# Altium PCB pcb.PcbDoc
Units mm, origin at the board's own origin, x right, y up, seen from the top; angles counter-clockwise.
Board outline 77.5 x 20 mm, 2 copper layers (Top Layer, Bottom Layer); 41 components, 45 nets, 171 pads, 16 vias.
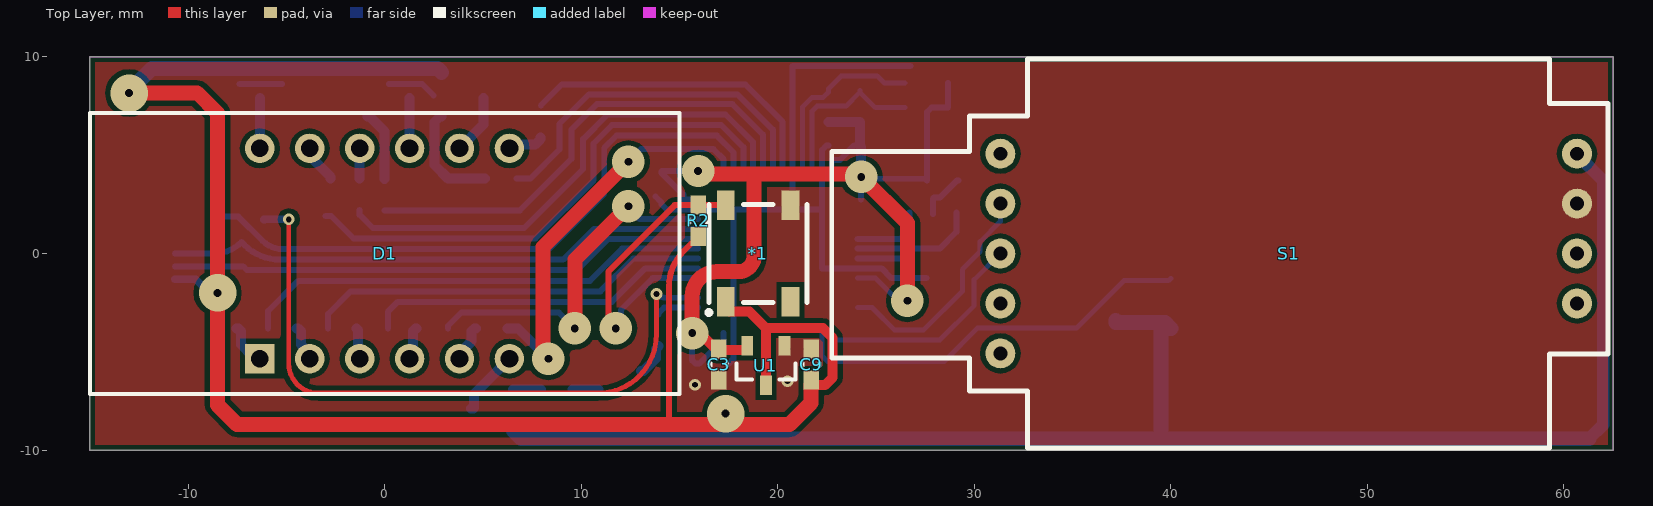
[diagram p0: Top Layer view]
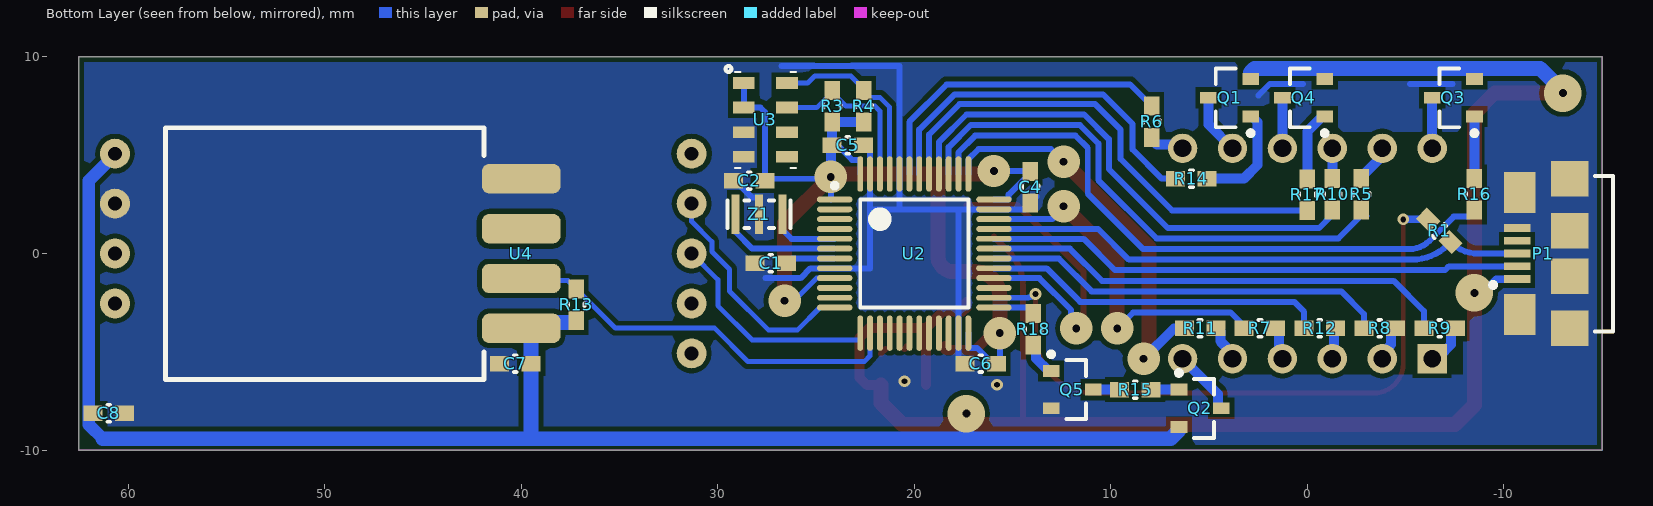
[diagram p1: Bottom Layer view, seen from below]
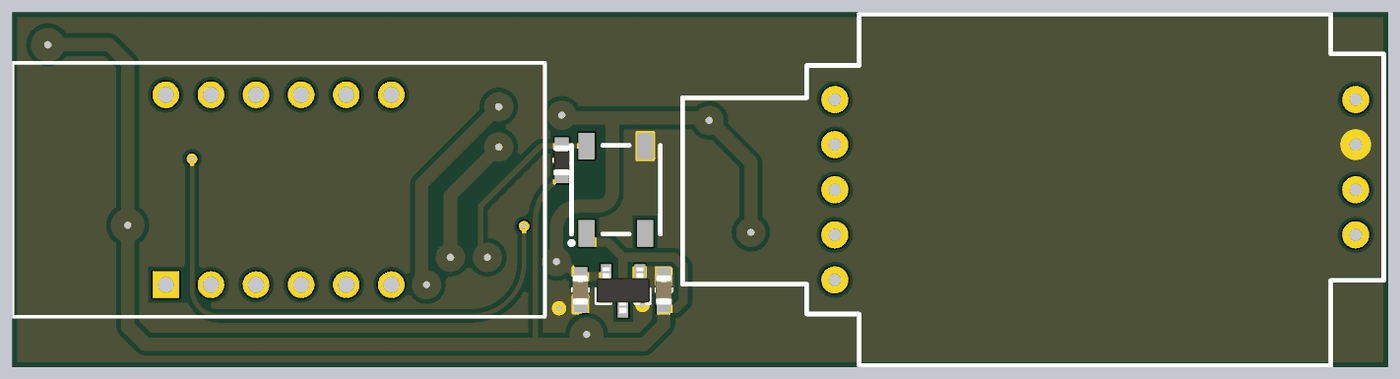
[diagram p2: 3D render of the assembled board from above, using the file's embedded part models]
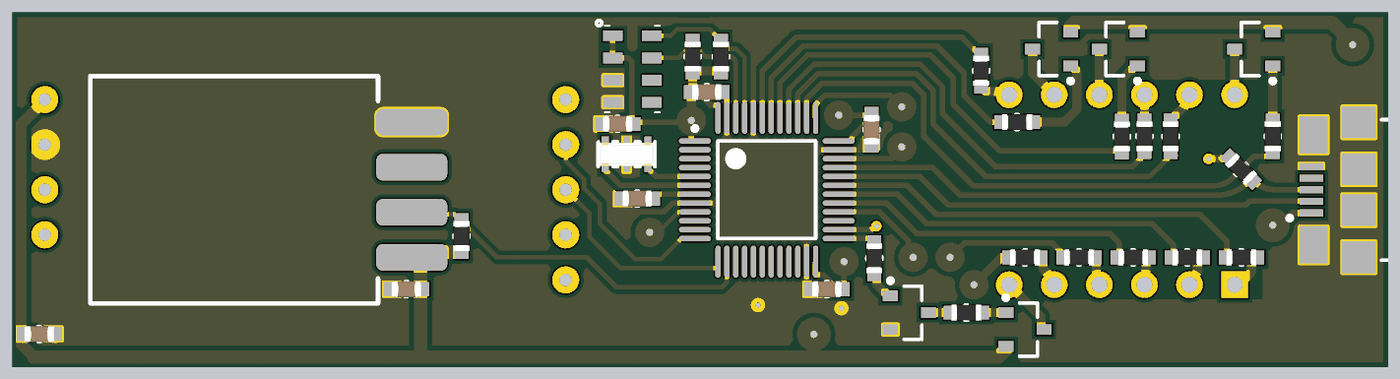
[diagram p3: 3D render of the assembled board from below, using the file's embedded part models]

## Layer stack, top to bottom
Top Solder: solder mask 0.0102, Solder Resist, Dk 3.5
Top Layer: signal copper 0.0356
Dielectric 1: dielectric 0.32, FR-4, Dk 4.8
Bottom Layer: signal copper 0.0356
Bottom Solder: solder mask 0.0102, Solder Resist, Dk 3.5

## Board outline
-15,-10 -15,10 62.5,10 62.5,-10

## Design rules (kind name [scope] priority, off if disabled: settings)
Clearance [All] p1: gap=0.127 ignorepadtopadclearanceinfootprint=FALSE except(0.254: Arc-Fill Arc-Poly Arc-Region Track-Fill Track-Poly Track-Region SMDPad-Fill SMDPad-Poly SMDPad-Region THPad-Fill THPad-Poly THPad-Region Via-Fill Via-Poly Via-Region Fill-Fill Fill-Poly Fill-Region Poly-Poly Poly-Region Region-Region)
MinimumSolderMaskSliver [All] p1 off: minsoldermaskwidth=0.254
PolygonConnect [All] p1: connectstyle=Direct reliefconductorwidth=0.254 reliefentries=4 polygonreliefangle="90 Angle" airgapwidth=0.254
RoutingVias [All] p1: holewidth=0.711 width=1.27 viastyle="Through Hole" minholewidth=0.4 minwidth=1 maxholewidth=0.711 maxwidth=5
SilkToSolderMaskClearance [IsPad] p1 off: minsilkscreentomaskgap=0.254 clearancetoexposedcopper=TRUE
SolderMaskExpansion [All] p1: expansion=0.102 istentingtop=FALSE
Width [All] p1: maxlimit=12.7 minlimit=0.191 preferedwidth=0.254
28 further rules are at their usual default settings.

## Components (designator, comment, footprint, x,y, rotation, side; value= is the part's Value field where it differs from the comment)
*1 "LED_WS2812B" LED_WS2812b 19,0 r90 top
C1 "100nF" RC_0603 27.3,-0.5 r180 bottom
C2 "100nF" RC_0603 28.4,3.71 r180 bottom
C3 "100nF" RC_0603 17,-5.646 r90 top
C4 "100nF" RC_0603 14.1,3.383 r90 bottom
C5 "100nF" RC_0603 23.383,5.5 r0 bottom
C6 "100nF" RC_0603 16.617,-5.6 r180 bottom
C7 "100nF" RC_0603 40.3,-5.6 r180 bottom
C8 "100nF" RC_0603 60.985,-8.128 r0 bottom
C9 "100nF" RC_0603 21.7,-5.646 r270 top
D1 "7SEGx4" 7SEG_4X_MEDIUM 0,0 r0 top
P1 "USB" RR_USB_MICRO_#1 -10,0 r180 bottom
Q1 "PNP" SOT-23B_L 3.962,7.925 r0 bottom
Q2 "PNP" SOT-23B_L 5.461,-7.875 r180 bottom
Q3 "PNP" SOT-23B_L -7.425,7.925 r0 bottom
Q4 "PNP" SOT-23B_L 0.195,7.925 r0 bottom
Q5 "NPN_SOT23" SOT-23B_L 11.963,-6.925 r180 bottom
R1 "1k5" RR_0603 -6.713,1.15 r225 bottom
R2 "470" RR_0603 15.95,1.66 r270 top
R3 "2k2" RR_0603 24.183,7.5 r270 bottom
R4 "2k2" RR_0603 22.583,7.5 r270 bottom
R5 "220" RR_0603 -2.743,3.01 r90 bottom
R6 "220" RR_0603 7.925,6.706 r270 bottom
R7 "220" RR_0603 2.413,-3.81 r180 bottom
R8 "220" RR_0603 -3.683,-3.81 r180 bottom
R9 "220" RR_0603 -6.731,-3.81 r180 bottom
R10 "220" RR_0603 -1.27,3.01 r90 bottom
R11 "220" RR_0603 5.461,-3.81 r180 bottom
R12 "220" RR_0603 -0.635,-3.81 r180 bottom
R13 "2k2" RR_0603 37.2,-2.61 r270 bottom
R14 "1k" RR_0603 5.9,3.81 r180 bottom
R15 "1k" RR_0603 8.763,-6.925 r180 bottom
R16 "1k" RR_0603 -8.5,3.01 r90 bottom
R17 "1k" RR_0603 0,3 r90 bottom
R18 "1k" RR_0603 13.945,-3.861 r270 bottom
S1 "MH-Z19B" MH_Z19B 46,0 r180 top locked
U1 "XC6206P332MR" RR_SOT-23 19.4,-5.7 r270 top
U2 "STM32F302C8T6" LQFP48_N 20,0 r180 bottom
U3 "Pressure Sensor" MS5611-01BA03 27.575,6.8 r180 bottom
U4 "DHT11" DHT11 50,0 r0 bottom
Z1 "8MHz" RR_CRYSTAL_3.2X1.3 27.9,2 r180 bottom value="CER RES 8.0000MHZ 33PF SMD"

## Footprints (in the part's own frame and the unit in brackets; to place one, negate y for a bottom-side part, rotate by r counter-clockwise, add the part's x,y. Pads: shape width x height; smd on the part's side, far side on the other; paste and mask are expansions set on the pad)
7SEG_4X_MEDIUM [mm] "LED, 7-Segment Display, 9.2 mm, Dual Digit; 10 Leads; Row Space 10.7 mm; Pitch 2.54 mm"
  rect 1.5x1.5 hole 0.9: 1(-6.35,-5.35)
  round 1.5 hole 0.9: 2(-3.81,-5.35) 3(-1.27,-5.35) 4(1.27,-5.35) 5(3.81,-5.35) 6(6.35,-5.35) 7(6.35,5.35) 8(3.81,5.35) 9(1.27,5.35) 10(-1.27,5.35) 11(-3.81,5.35) 12(-6.35,5.35)
  silkscreen extent -15,-7.15 15,7.15, body extent -15,-7.15 15,7.15, height 7.1
DHT11 [mm]
  rrect50% 4x1.5 smd: 1(-10,3.81) 2(-10,1.27) 3(-10,-1.27) 4(-10,-3.81)
  silkscreen extent -8.1,-6.4 8.1,6.4, body extent -8.1,-6.4 8.1,6.4, height 6.1
LED_WS2812b [mm]
  rect 1.5x0.9 smd: 1(-2.46,1.65) 2(-2.46,-1.65) 3(2.46,-1.65) 4(2.46,1.65)
  silkscreen extent -3.1,-2.5 2.5,2.6, body extent -2.5,-2.5 2.5,2.5, height 1.6
LQFP48_N [mm] "Thin QFP, 48-Leads, Body 7x7mm, Pitch 0.5mm, IPC Medium Density"
  oval 1.8x0.3 smd: 1(-4.05,2.75) 2(-4.05,2.25) 3(-4.05,1.75) 4(-4.05,1.25) 5(-4.05,0.75) 6(-4.05,0.25) 7(-4.05,-0.25) 8(-4.05,-0.75) 9(-4.05,-1.25) 10(-4.05,-1.75) 11(-4.05,-2.25) 12(-4.05,-2.75) 25(4.05,-2.75) 26(4.05,-2.25) 27(4.05,-1.75) 28(4.05,-1.25) 29(4.05,-0.75) 30(4.05,-0.25) 31(4.05,0.25) 32(4.05,0.75) 33(4.05,1.25) 34(4.05,1.75) 35(4.05,2.25) 36(4.05,2.75)
  oval 0.3x1.8 smd: 13(-2.75,-4.05) 14(-2.25,-4.05) 15(-1.75,-4.05) 16(-1.25,-4.05) 17(-0.75,-4.05) 18(-0.25,-4.05) 19(0.25,-4.05) 20(0.75,-4.05) 21(1.25,-4.05) 22(1.75,-4.05) 23(2.25,-4.05) 24(2.75,-4.05) 37(2.75,4.05) 38(2.25,4.05) 39(1.75,4.05) 40(1.25,4.05) 41(0.75,4.05) 42(0.25,4.05) 43(-0.25,4.05) 44(-0.75,4.05) 45(-1.25,4.05) 46(-1.75,4.05) 47(-2.25,4.05) 48(-2.75,4.05)
  silkscreen extent -4.18,-2.75 2.75,3.57, body extent -3.5,-3.5 3.5,3.5, height 1.6
MH_Z19B [mm]
  round 1.524 hole 0.7: 1(-14.67,2.54) 2(-14.67,0) 3(-14.67,-2.54) 4(-14.67,-5.08) 5(14.67,-5.08) 6(14.67,-2.54) 7(14.67,0) 8(14.67,2.54) 9(14.67,5.08)
  silkscreen extent -16.25,-9.9 23.25,9.9, body extent -13.3,-9.9 13.3,9.9, height 9
MS5611-01BA03 [mm] "MS5611-01BA03 Pressure Sensor"
  rect 1.1x0.6 smd mask+0.1: 1(-1.1,1.875) 2(-1.1,0.625) 3(-1.1,-0.625) 4(-1.1,-1.875) 5(1.1,-1.875) 6(1.1,-0.625) 7(1.1,0.625) 8(1.1,1.875)
  silkscreen extent -2.03,-2.44 1.55,2.74, body extent -1.5,-2.36 1.5,2.36, height 1.02
RC_0603 [mil] "Chip Capacitor"
  rect 38x31 smd: 1(-31.5,0) 2(31.5,0)
  silkscreen extent -3,-17 3,17, body extent -33,-18 33,18, height 35
RR_0603 [mil] "Chip Resistor; Body 1.6 x 0.8 mm (LxW typ)"
  rect 38x31 smd: 1(-31.5,0) 2(31.5,0)
  silkscreen extent -3,-17 3,17, body extent -33,-18 33,18, height 22
RR_CRYSTAL_3.2X1.3 [mm]
  rect 0.4x2 smd: 1(1.2,0) 2(0,0) 3(-1.2,0)
  silkscreen extent -1.6,-0.7 1.6,0.7, body extent -1.6,-0.65 1.6,0.65, height 0.7
RR_SOT-23 [mm] "SOT23, 3-Leads, Body 2.9x1.3mm, Pitch 0.95mm, Lead Span 2.3mm, IPC High Density"
  rect 1x0.6 smd: 1(-1,0.95) 2(-1,-0.95) 3(1,0)
  silkscreen extent -0.1,-1.5 0.7,1.5, body extent -1.33,-1.5 1.27,1.5, height 1.1
RR_USB_MICRO_#1 [mm] "Connector; USB2.0, Type B, SM; 5 Position; Right Angle"
  rect 1.35x0.4 smd: 1(0.675,-1.3) 2(0.675,-0.65) 3(0.675,0) 4(0.675,0.65) 5(0.675,1.3)
  rect 1.6x2.1 smd: 6(0.8,-3.1) 6(0.8,3.1)
  rect 1.9x1.8 smd: 6(3.35,-3.8) 6(3.35,-1.15) 6(3.35,1.15) 6(3.35,3.8)
  silkscreen extent -0.68,-3.98 5.55,3.95, body extent 0.1,-3.95 5.55,3.95, height 3.9
SOT-23B_L [mm] "SOT23, 3-Leads, Body 2.9x1.3mm, Pitch 0.95mm, Lead Span 2.4mm, IPC High Density"
  rect 0.85x0.6 smd: 1(-1.075,0.95) 2(-1.075,-0.95) 3(1.075,0)
  silkscreen extent -1.2,-1.5 0.7,1.92, body extent -0.7,-1.5 0.7,1.5, height 1.14

## Part data
C1 C2 C3 C4 C5 C6 C7 C8 C9: library part Cap, "Capacitor"
P1: library part "Header 6", "Header, 6-Pin", LatestRevisionDate=17-Jul-2002, LatestRevisionNote="Re-released for DXP Platform.", Publisher="Altium Limited"
Q1 Q2 Q3 Q4: library part PNP_SOT23, "PNP Bipolar Transistor", LatestRevisionDate=29-May-2009, LatestRevisionNote="IPC-7351 Footprint Added.", PackageDescription="3-Pin SOT-23 Package 0.95 mm Pitch, 2.4 mm Lead Span", PackageReference=SOT-23B, PackageVersion=Aug-1999, Published=8-Jun-2000, Publisher="Altium Limited"
Q5: "NPN Bipolar Transistor", Code_JEDEC=TO-226-AA, LatestRevisionDate=17-Jul-2002, LatestRevisionNote="Re-released for DXP Platform.", PackageDescription="TO, Flat Index; 3 In-Line, Axial Leads; Body Dia. 4.8mm; Leads 0.55 x 0.51 mm (max)", PackageReference=TO-226-AA, Published=8-Jun-2000, Publisher="Altium Limited"
R1 R2 R3 R4 R5 R6 R7 R8 R9 R10 R11 R12 R13 R14 R15 R16 R17 R18: library part Res1, "Resistor"
S1: library part MH_Z19B
U1: library part Component_4_1
U3: library part MS5611-01BA03, "Pressure Sensor - MS5611-01BA03"
Z1: library part CSTCE8M00G55-R0, "XTAL 8.0000MHZ 33PF SMD", Manufacturer="Murata Electronics", Package="3-SMD 3,2mm x 1,3mm", Cost=0,48, Order Number=CSTCE8M00G55-R0
U2: ComponentLink1Description="Manufacturer Link", ComponentLink1URL=www.st.com/stm32, ComponentLink2Description=Datasheet, ComponentLink2URL=http://www.st.com/stonline/products/literature/ds/13587.pdf, DatasheetVersion="rev6, Mar-2008", PackageDescription="48-Pin Low-Profile Quad Flat Pack, 7 x 7 mm Body, 0.5 mm Pitch (LQFP48)", PackageReference=LQFP48, PackageVersion=Mar-2008, Published=30-May-2008, Publisher="Altium Limited"

## Via types
v1: diameter 1.651, hole 0.4, Top Layer to Bottom Layer, tented both sides, 9 vias
v2: diameter 0.6, hole 0.3, Top Layer to Bottom Layer, 4 vias
v3: diameter 1.905, hole 0.4, Top Layer to Bottom Layer, tented both sides, 3 vias

## Nets (pads, with @x,y where several pads share a name; then routed paths per layer and width w, separated by ;. In a path a pad name is that pad's centre, name@x,y a point inside that pad or via, vN(x,y) a via of type N, cw(c..) or ccw(c..) an arc to the next point about the centre after c; other vN are vias at no path point)
3V3: C2.2 C3.2 C4.2 C5.2 C6.2 R3.2 R4.2 U1.2 U2.1 U2.9 U2.24 U2.36 U2.48 U3.1 U3.2 | length 58.6
  Top Layer w0.508: v1(15.65,-4.05) 15.869,-4.269 16.258,-4.269 17,-5.011 C3.2@17,-5.04 ; C3.2@17,-5.1 C3.2@17,-5.04 ; U1.2 18.45,-4.854 18.404,-4.9 17.14,-4.9 C3.2@17,-5.04
  Top Layer w0.762: v1(15.65,-4.05) 15.65,-2.178 cw(c16.907,-2.178) 16.907,-0.921 18,-0.921 ccw(c18,-0.121) 18.8,-0.121 18.8,4.05 ; v1(15.95,4.2) 16.1,4.05 18.8,4.05 ; v1(26.6,-2.4) 26.6,1.55 v1(24.25,3.9) 24.1,4.05 18.8,4.05
  Bottom Layer w0.254: U2.9 24.974,-1.25 26.124,-2.4 v1(26.6,-2.4)
  Bottom Layer w0.305: v1(15.65,-4.05) 15.65,-5.433 C6.2 16.007,-5.6 16.812,-4.795 17.25,-4.795 U2.24 ; U2.36 15.205,2.75 15.202,2.752 15.202,2.992 14.1,4.094 C4.2 14.117,4.2 v1(15.95,4.2) ; U2.48 22.75,4.766 22.752,4.768 23.168,4.768 23.9,5.5 C5.2 C5.2@24.25,5.433 ; U2.1@24.25,2.75 v1(24.25,3.9) 24.345,3.805 27.505,3.805 C2.2 27.6,7.2 27.825,7.425 U3.2 U3.1
  Bottom Layer w0.508: R4.2 R3.2 C5.2 ; v1(24.25,3.9) C5.2@24.25,5.433
5V: *1.1 C7.2 C8.2 C9.2 P1.1 Q1.2 Q2.2 Q3.2 Q4.2 R2.2 R13.2 S1.4 U1.3 U4.1 | length 173.7
  Top Layer w0.3: 14.467,-8.7 14.467,-1.675 cw(c17.007,-1.675) 15.211,0.121 R2.2
  Top Layer w0.508: *1.1 17.35,-2.76 17.546,-2.956 18.556,-2.956 19.4,-3.8 ; U1.3 19.4,-3.8 ; C9.2@21.7,-6.7 22.4,-6.7 22.8,-6.3 22.8,-4.3 22.3,-3.8 19.4,-3.8
  Top Layer w0.762: v3@-13,8.179 -9.539,8.179 -8.5,7.14 v3(-8.5,-2) -8.5,-7.705 -7.505,-8.7 14.467,-8.7 20.6,-8.7 21.7,-7.6 C9.2@21.7,-6.7
  Bottom Layer w0.381: P1.1 -9.612,-1.3 -8.912,-2 v3(-8.5,-2)
  Bottom Layer w0.635: S1.4@60.67,5.046 62,3.716 62,-8.714 61.29,-9.423
  Bottom Layer w0.762: v3@-12.827,8.433 -11.836,9.423 -7.3,9.423 -0.88,9.423 2.692,9.423 2.896,9.22 ; Q2.2@6.553,-9.017 6.96,-9.423 17.35,-9.423 ; v3(17.35,-8.141) 17.35,-9.423 ; R13.2 37.2,-3.499 37.213,-3.512 39.702,-3.512 U4.1 39.5,-3.81 C7.2 39.5,-9.423 ; S1.4@60.67,5.046 S1.4 ; 61.29,-9.423 39.5,-9.423 ; 17.35,-9.423 39.5,-9.423
  other v3: -13,8.165
A: R5.1 U2.39 | length 27
  Bottom Layer w0.305: R5.1@-3.01,1.91 -2.723,1.91 -1.575,0.762 7.669,0.762 10.637,3.731 10.637,5.598 11.577,6.538 17.123,6.538 18.25,5.41 U2.39
A1: R16.1 U2.38 | length 32.3
  Bottom Layer w0.305: R16.1 -8.5,2.121 -8.259,1.88 -7.442,1.88 -6.213,0.65 ccw(c-5.187,1.676) -5.187,0.225 8.355,0.225 11.175,3.045 11.175,5.375 11.8,6 16.9,6 17.75,5.15 U2.38
A2: R17.1 U2.41 | length 25
  Bottom Layer w0.305: R17.1 6.89,2.2 9.5,4.81 9.5,6.3 10.8,7.6 17.7,7.6 19.25,6.05 U2.41
A3: R14.1 U2.42 | length 18.6
  Bottom Layer w0.305: R14.1 7.41,3.81 8.9,5.3 8.9,6.6 10.4,8.1 17.95,8.1 19.75,6.3 U2.42
A4: R18.1 U2.25 | length 2.2
  Bottom Layer w0.305: R18.1@13.945,-3.111 13.945,-3.023 14.217,-2.75 U2.25
B: R6.1 U2.43 | length 16.2
  Bottom Layer w0.305: R6.1@7.95,7.531 9.019,8.6 18.35,8.6 20.25,6.7 U2.43
C: R7.1 U2.34 | length 18.3
  Top Layer w0.762: v1(9.677,-3.81) 9.677,-0.313 v1(12.4,2.409)
  Bottom Layer w0.305: R7.1 3.213,-3.687 3.9,-3 8.867,-3 v1(9.677,-3.81) ; v1@12.4,2.13 12.588,2.13 12.968,1.75 U2.34
D: R8.1 U2.30 | length 20.7
  Bottom Layer w0.305: R8.1 -2.883,-3.083 -1.725,-1.925 10.975,-1.925 12.65,-0.25 U2.30
DHT: R13.1 U2.14 U4.2 | length 20.8
  Bottom Layer w0.254: U2.14 22.25,-5.204 22.546,-5.5 28.459,-5.5 30.159,-3.8 35.2,-3.8 37.619,-1.381 39.889,-1.381 U4.2
DM: P1.2 U2.32 | length 27.4
  Bottom Layer w0.305: P1.2 -7.2,-0.65 -7,-0.85 9.787,-0.85 11.387,0.75 U2.32
DOT: R12.1 U2.29 | length 17.5
  Bottom Layer w0.305: R12.1 0.165,-2.966 0.668,-2.462 11.558,-2.462 13.27,-0.75 U2.29
DP: P1.3 R1.2 U2.33 | length 27.7
  Bottom Layer w0.305: P1.3 -8.689,0 ccw(c-8.689,1.995) R1.2 -7.126,0.431 ccw(c-5.33,2.227) -5.33,-0.313 9.088,-0.313 10.65,1.25 U2.33
E: R9.1 U2.31 | length 24.1
  Bottom Layer w0.305: R9.1 -5.931,-2.931 -4.388,-1.388 10.448,-1.388 12.085,0.25 U2.31
F: R10.1 U2.40 | length 26
  Bottom Layer w0.305: R10.1 -1.27,1.97 -0.6,1.3 7.1,1.3 10.1,4.3 10.1,5.82 11.355,7.075 17.345,7.075 18.75,5.67 U2.40
G: R11.1 U2.37 | length 20.7
  Top Layer w0.762: v1(8.331,-5.35) 8.052,-5.071 8.052,0.322 v1(12.4,4.67)
  Bottom Layer w0.305: v1(12.4,4.67) 13.051,5.321 16.724,5.321 17.25,4.795 U2.37
  Bottom Layer w0.508: R11.1 6.791,-3.81 v1(8.331,-5.35)
GND: *1.3 C1.1 C2.1 C3.1 C4.1 C5.1 C6.1 C7.1 C8.1 C9.1 P1.5 P1.6 Q5.2 S1.3 U1.1 U2.8 U2.23 U2.35 U2.44 U2.47 U3.3 U3.4 U4.4 Z1.2 | length 49.8
  Top Layer w0.305: U1.1 U1.1@20.498,-4.848 ; C9.1@21.459,-4.848 21.7,-5.089 C9.1@21.7,-5.1
  Bottom Layer w0.305: -7.391,8.636 -5.232,8.636 ; 0.229,8.636 1.905,8.636 2.489,8.052 ; C4.1@13.783,2.9 C4.1 14.1,2.494 14.341,2.252 15.95,2.252 U2.35 17.75,2.25 ; C6.1 17.506,-5.6 17.748,-5.359 17.748,-4.052 U2.23 17.75,2.25 ; C5.1 22.494,5.5 22.252,5.259 22.252,4.052 U2.47 22.25,2.25 ; 26.746,9.55 20.75,9.55 U2.44 20.75,2.25 ; 27.559,-1.25 25.786,-1.25 25.289,-0.752 24.052,-0.752 U2.8 22.25,-0.75 22.25,2.25 ; Z1.2 27.9,2.8 27.948,2.848 28.249,2.848 29.111,3.71 C2.1 ; 17.75,2.25 20.75,2.25 ; 20.75,2.25 22.25,2.25
  other v2: 15.798,-6.676 20.498,-6.498
LED_SERIAL: *1.4 R2.1 U2.28 | length 15.5
  Top Layer w0.305: v1@11.379,-3.431 11.379,-0.921 14.76,2.46 *1.4
  Bottom Layer w0.305: v1(11.762,-3.81) 12.02,-3.552 12.02,-2.873 13.642,-1.25 U2.28
NetC1_2: C1.2 U2.7 | length 2.6
  Bottom Layer w0.305: U2.7 26.25,-0.25 C1.2
NetD1_1: D1.1 R9.2 | length 1.8
  Bottom Layer w0.508: R9.2 -7.442,-3.81 -7.302,-3.95 -7.302,-4.635 D1.1@-6.731,-5.207
NetD1_2: D1.2 R8.2 | length 1.9
  Bottom Layer w0.508: R8.2 -4.394,-3.81 -4.255,-3.95 -4.255,-4.637 -3.81,-5.082 D1.2
NetD1_3: D1.3 R12.2 | length 1.6
  Bottom Layer w0.508: R12.2 -1.353,-3.893 -1.353,-5.267 D1.3
NetD1_4: D1.4 R7.2 | length 1.7
  Bottom Layer w0.508: D1.4 1.441,-5.179 1.441,-3.95 1.581,-3.81 R7.2
NetD1_5: D1.5 R11.2 | length 1.9
  Bottom Layer w0.508: D1.5 3.81,-5.082 4.432,-4.459 4.432,-3.95 4.572,-3.81 R11.2
NetD1_6: D1.6 Q2.3 | length 3.4
  Bottom Layer w0.508: Q2.3 4.511,-7.875 4.557,-7.829 4.557,-7.143 D1.6
NetD1_7: D1.7 R6.2 | length 1.9
  Bottom Layer w0.508: D1.7 6.54,5.54 7.648,5.54 7.925,5.817 R6.2
NetD1_8: D1.8 Q1.3 | length 3.1
  Bottom Layer w0.508: D1.8 5.037,6.577 Q1.3
NetD1_9: D1.9 Q4.3 | length 2.6
  Bottom Layer w0.508: D1.9 Q4.3
NetD1_10: D1.10 R10.2 | length 1.5
  Bottom Layer w0.508: R10.2 D1.10
NetD1_11: D1.11 R5.2 | length 2
  Bottom Layer w0.508: D1.11 -3.62,5.16 -3.62,4.776 -2.743,3.899 R5.2
NetD1_12: D1.12 Q3.3 | length 2.6
  Bottom Layer w0.508: D1.12 Q3.3
NetQ1_1: Q1.1 R14.2 | length 5.5
  Bottom Layer w0.508: Q1.1 2.819,6.975 2.54,6.695 2.54,4.507 3.237,3.81 R14.2
NetQ2_1: Q2.1 R15.2 | length 1.4
  Bottom Layer w0.508: Q2.1 R15.2
NetQ3_1: Q3.1 R16.2 | length 3.2
  Bottom Layer w0.508: R16.2 Q3.1
NetQ4_1: Q4.1 R17.2 | length 3.6
  Bottom Layer w0.508: Q4.1 -0.755,6.975 0,6.22 R17.2
NetQ5_1: Q5.1 R18.2 | length 1.7
  Bottom Layer w0.508: Q5.1 13.163,-5.975 13.805,-5.333 13.805,-4.851 R18.2@13.945,-4.712
NetQ5_3: Q5.3 R15.1 | length 1.3
  Bottom Layer w0.508: R15.1 Q5.3
NetR1_1: R1.1 U2.26 | length 34.1
  Top Layer w0.25: v2(-4.877,1.741) -4.877,-5.609 ccw(c-3.38,-5.609) -3.38,-7.106 10.857,-7.106 ccw(c10.857,-4.136) 13.827,-4.136 v2(13.827,-2.056)
  Bottom Layer w0.3: v2(13.827,-2.056) ccw(c14.295,-1.589) 14.295,-2.25 U2.26
  Bottom Layer w0.4: R1.1 cw(c-6.086,1.654) -6.086,1.741 v2(-4.877,1.741)
NetU2_5: U2.5 Z1.1 | length 3.7
  Bottom Layer w0.305: U2.5 26.25,0.75 26.7,1.2 Z1.1 Z1.1@26.7,2.1
NetU2_6: U2.6 Z1.3 | length 6.4
  Bottom Layer w0.305: U2.6 28.25,0.25 29.1,1.1 Z1.3 Z1.3@29.1,2.1
RX: S1.6 U2.12 | length 11.9
  Bottom Layer w0.254: U2.12 24.8,-2.75 25.95,-3.9 27.411,-3.9 29.4,-1.911 29.4,-0.8 30.3,0.1 30.3,0.6 31.33,1.63 S1.6
SCL: R4.1 U2.45 U3.8 | length 9.5
  Bottom Layer w0.254: U2.45 21.25,7.444 21.75,7.945 22.316,7.945 22.583,8.211 R4.1 22.583,8.389 23.23,9.037 25.063,9.037 25.425,8.675 U3.8
SDA: R3.1 U2.46 U3.7 | length 8.7
  Bottom Layer w0.254: U2.46 21.75,7.25 22,7.5 23.472,7.5 R3.1@24.183,8.211 ; R3.1 R3.1@24.183,8.211 ; U3.7 24.969,7.425 R3.1@24.183,8.211
TX: S1.7 U2.13 | length 11.5
  Bottom Layer w0.254: U2.13 22.75,-4.4 28.25,-4.4 30,-2.65 30,-1.33 S1.7
pads on no net: *1.2 P1.4 S1.1 S1.2 S1.5 S1.8 S1.9 U2.2 U2.3 U2.4 U2.10 U2.11 U2.15 U2.16 U2.17 U2.18 U2.19 U2.20 U2.21 U2.22 U2.27 U3.5 U3.6 U4.3

## Polygon pours and split planes (outlines as drawn)
GND on Top Layer "Top Layer-GND" (solid, remove dead copper, pour order 0): -15,10 -15,-10 62.5,-10 62.5,10
GND on Bottom Layer "Bottom Layer-GND" (solid, remove dead copper, pour order 2): -15,10 -15,-10 62.5,-10 62.5,10

## Keep-outs
Keep-Out Layer:
  the board outline again, w0.025

## Other copper
Bottom Layer:
  pour cut-out: -7.874,-4.502 7.29,-4.502 7.29,-6.171 -7.925,-6.171 -7.925,-4.477
  pour cut-out: -7.874,6.198 7.29,6.198 7.29,4.529 -7.925,4.529 -7.925,6.223

## Text inside footprints (layer, text, board x,y; h text height)
P1: Mechanical 1 "PCB Edge" at -15.225,-3.7 h0.25 r270